# EAGLE board 14 pin sop (EAGLE 7.2.0)
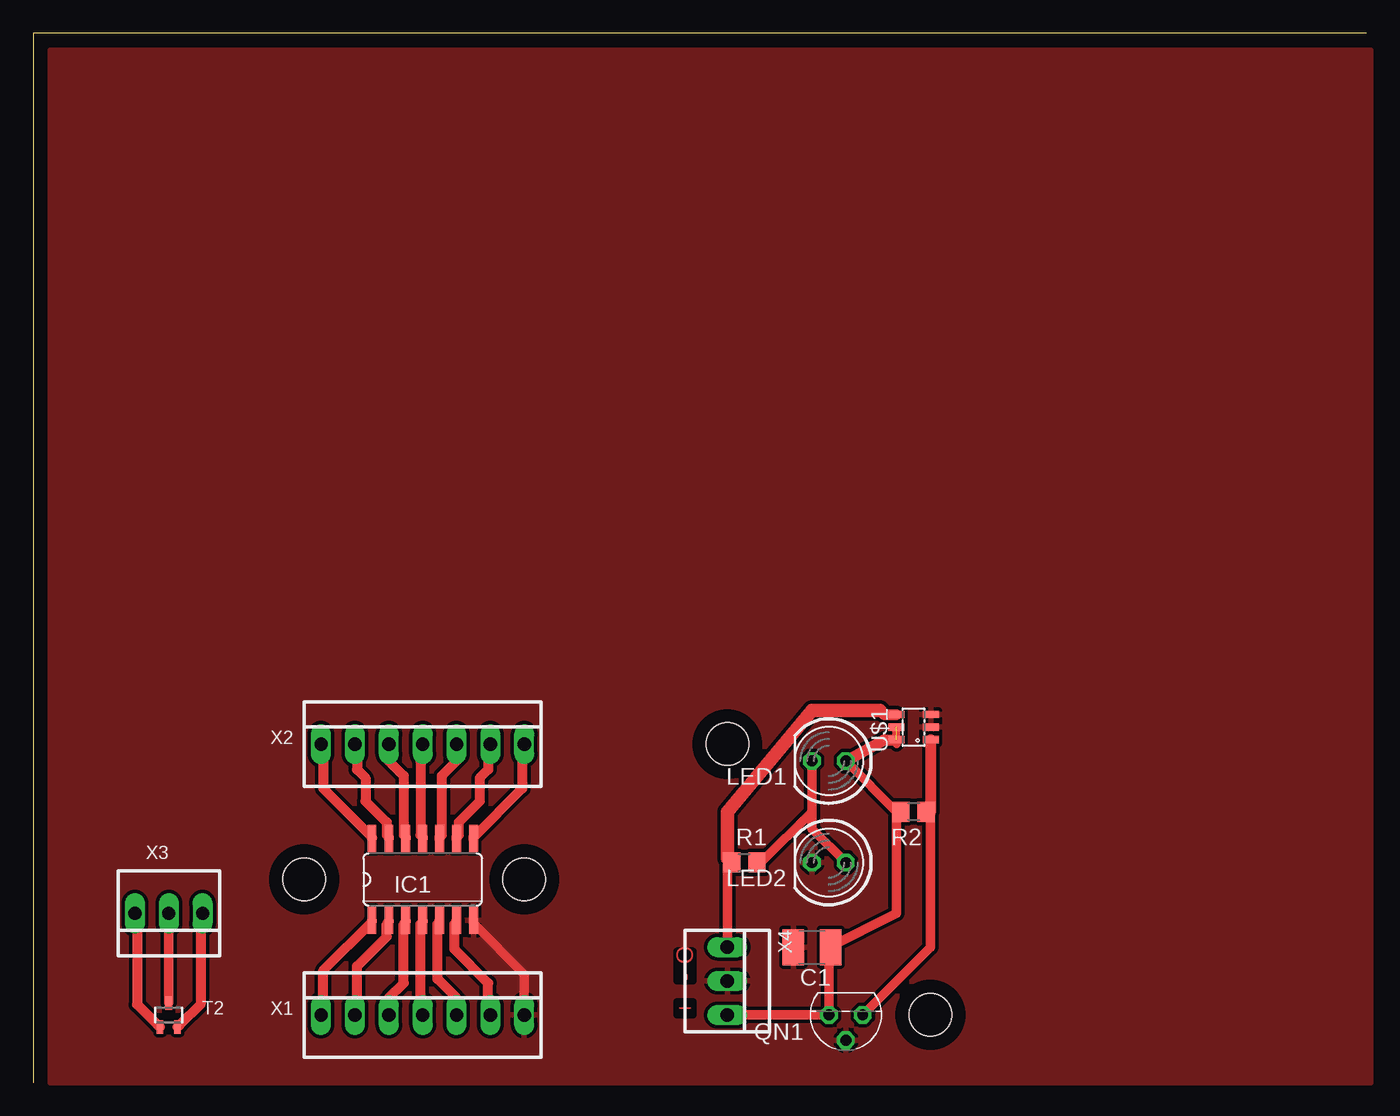
[diagram p0: board, top side]
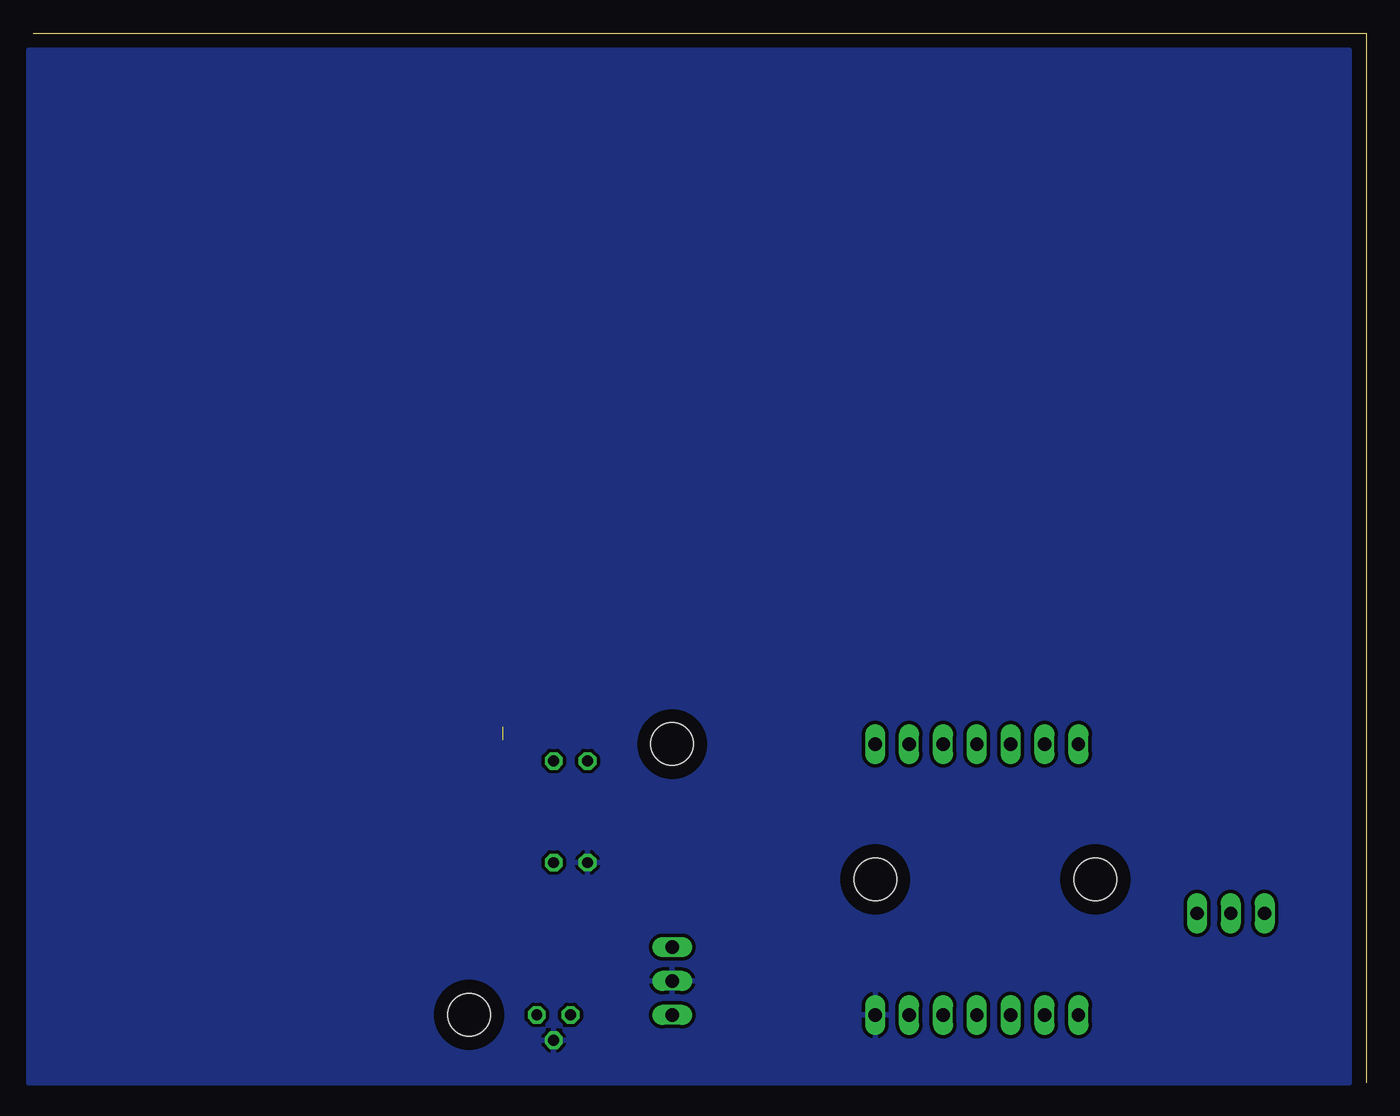
[diagram p1: board, bottom side, seen from below]

Size 100 x 78.73 mm. Coordinates in mm from the lower left corner, seen from the top.
Outline: 100,78.73 0,78.73 0,0
Copper layers (1*16): Top 0.035mm / dielectric 1.5mm / Bottom 0.035mm
Design rules "14 pin sop *": minimum track width 10mil, minimum drill 24mil, track to track 0.205mm, track to pad 0.205mm, pad to pad 12mil, via to via 12mil, smd to smd 8mil, copper to edge 40mil, drill to drill 8mil, minimum pad ring 10mil, minimum via ring 8mil, stop-mask expansion 4mil, vias tented up to drill 0mil, thermal gap 10mil
Net classes: 0 default: width 0.711 mm, drill 0.508 mm, clearance 0.254 mm
Holes 3.2 mm at 36.83,15.24 20.32,15.24 52.07,25.4 67.31,5.08

## Footprints (pad centres in the part's own frame; a part is rotated, then mirrored left to right if it is on the bottom)
C1210 = smd 1.6 x 2.7: 1 -1.4,0; 2 1.4,0
SO14 = smd 0.66 x 2.032: 1 -3.81,-3.073; 2 -2.54,-3.073; 3 -1.27,-3.073; 4 0,-3.073; 5 1.27,-3.073; 6 2.54,-3.073; 7 3.81,-3.073; 8 3.81,3.073; 9 2.54,3.073; 10 1.27,3.073; 11 0,3.073; 12 -1.27,3.073; 13 -2.54,3.073; 14 -3.81,3.073
LED5MM = drill 0.813 octagon: A -1.27,0; K 1.27,0
TO92 = drill 0.813 octagon: 1 1.27,0; 2 0,1.905; 3 -1.27,0
R0805 = smd 1.3 x 1.5: 1 -0.95,0; 2 0.95,0
SOT323 = smd 0.5 x 1: 1 0,0.9; 2 -0.65,-0.9; 3 0.65,-0.9
SOT23-6 = smd 0.55 x 1.2: 1 -0.95,-1.3; 2 0,-1.3; 3 0.95,-1.3; 4 0.95,1.3; 5 0,1.3; 6 -0.95,1.3
22-23-2071 = drill 1 long: 1 -7.62,0; 2 -5.08,0; 3 -2.54,0; 4 0,0; 5 2.54,0; 6 5.08,0; 7 7.62,0
22-23-2031 = drill 1 long: 1 -2.54,0; 2 0,0; 3 2.54,0

## Placement (x,y rotation side)
C1  100nF  [C1210]  58.42,10.16 180 top
IC1  74AS04D  [SO14]  29.21,15.24 0 top
LED1  On  [LED5MM]  59.69,24.13 180 top
LED2  Off  [LED5MM]  59.69,16.51 180 top
QN1  2N3904  [TO92]  60.96,5.08 180 top
R1  330  [R0805]  53.34,16.51 0 top
R2  10k  [R0805]  66.04,20.32 180 top
T2  BFR91  [SOT323]  10.16,5.08 0 top
U$1  LT3426  [SOT23-6]  66.04,26.67 90 top
X1  22-23-2071  [22-23-2071]  29.21,5.08 0 top
X2  22-23-2071  [22-23-2071]  29.21,25.4 0 top
X3  22-23-2031  [22-23-2031]  10.16,12.7 180 top
X4  22-23-2031  [22-23-2031]  52.07,7.62 270 top

## Library data of the parts
C1 U$1 = adafruit
IC1 = 74xx-eu; OC_NEWARK: unknown
LED1 LED2 = led
QN1 = PAsystem
R1 R2 = eagle-ltspice; SPICEMODEL: NONE; SPICEPREFIX: R
T2 = zetex; MPN: DSS4160U-7; OC_FARNELL: 1710696; OC_NEWARK: 25R4558
X1 X2 = con-molex; MF: MOLEX; MPN: 22-23-2071; OC_FARNELL: 1654534; OC_NEWARK: 56H0445
X3 X4 = con-molex; MF: MOLEX; MPN: 22-23-2031; OC_FARNELL: 1462950; OC_NEWARK: 30C0862

## Nets
GND: C1.2 IC1.7 LED2.K QN1.2 U$1.2 U$1.3 X1.7 X4.2
N$1: IC1.1 X1.1
N$2: IC1.2 X1.2
N$3: IC1.3 X1.3
N$4: IC1.4 X1.4
N$5: IC1.5 X1.5
N$6: IC1.6 X1.6
N$7: IC1.8 X2.7
N$8: IC1.9 X2.6
N$9: IC1.10 X2.5
N$10: IC1.11 X2.4
N$11: IC1.12 X2.3
N$12: IC1.13 X2.2
N$13: C1.1 LED1.A QN1.1 R2.2 U$1.5 U$1.6 X4.3
N$14: T2.2 X3.3
N$15: T2.3 X3.1
N$16: T2.1 X3.2
N$17: QN1.3 R2.1 U$1.1
N$19: R1.1 U$1.4 X4.1
N$20: LED1.K LED2.A R1.2
VCC: IC1.14 X2.1

## Tracks (layer width: path | path; a pad name or v marks a point on that pad's centre or on a via)
GND
  Top 0.711: X1.7 36.83,8.13 33.02,11.94 IC1.7
  pour Top: 1.27,77.47 1.27,0 100.33,0 100.33,77.47
  pour Bottom: 1.27,77.47 1.27,0 100.33,0 100.33,77.47
N$1
  Top 0.762: X1.1 21.59,6.19 21.75,6.35 21.75,8.41 25.4,12.07 IC1.1
N$2
  Top 0.762: X1.2 24.13,6.19 24.29,6.35 24.29,8.73 26.51,10.95 26.51,11.91 26.67,12.07 IC1.2
N$3
  Top 0.762: X1.3 26.67,6.35 27.78,7.46 27.78,11.91 27.94,12.07 IC1.3
N$4
  Top 0.762: X1.4 29.21,6.19 29.05,6.35 29.05,11.91 29.21,12.07 IC1.4
N$5
  Top 0.762: X1.5 31.75,6.35 30.32,7.78 30.32,11.91 30.48,12.07 IC1.5
N$6
  Top 0.762: X1.6 34.29,6.19 34.13,6.35 34.13,7.46 31.59,10 31.59,11.91 31.75,12.07 IC1.6
N$7
  Top 0.762: X2.7 36.83,24.29 36.67,24.13 36.67,22.07 33.02,18.41 IC1.8
N$8
  Top 0.762: X2.6 34.29,24.29 34.13,24.13 34.13,23.5 33.5,22.86 33.5,21.11 31.91,19.53 31.91,18.57 31.75,18.41 IC1.9
N$9
  Top 0.762: X2.5 31.75,24.13 30.64,23.02 30.64,18.57 30.48,18.41 IC1.10
N$10
  Top 0.762: X2.4 29.21,24.29 29.05,24.13 29.05,18.57 29.21,18.41 IC1.11
N$11
  Top 0.762: X2.3 26.67,24.13 27.78,23.02 27.78,18.57 27.94,18.41 IC1.12
N$12
  Top 0.762: X2.2 24.13,24.29 24.29,24.13 24.29,23.5 24.92,22.86 24.92,21.11 26.51,19.53 26.51,18.57 26.67,18.41 IC1.13
N$13  (1 unrouted)
  Top 0.711: LED1.A 64.77,20.32 | 64.77,20.32 R2.2 | 59.69,10.16 QN1.1 X4.3 | 64.77,20.32 64.77,12.7 59.69,10.16 | 59.69,10.16 C1.1
  Top 0.813: LED1.A 63.82,25.72 U$1.6
N$14
  Top 0.762: X3.3 7.62,11.59 7.78,11.43 7.78,5.87 9.37,4.29 T2.2
N$15
  Top 0.762: X3.1 12.7,11.59 12.54,11.43 12.54,5.87 10.95,4.29 T2.3
N$16
  Top 0.711: X3.2 T2.1
N$17
  Top 0.711: QN1.3 67.31,10.16 67.31,20.32 R2.1
  Top 0.813: 67.31,20.32 67.34,20.35 U$1.1
N$18
  Top 0.61: 64.77,25.4 64.77,26.67
N$19
  Top 0.711: X4.1 52.07,16.51 R1.1
  Top 0.813: 63.5,27.94 63.82,27.62 U$1.4
  Top 1.016: R1.1 52.07,16.83 52.07,20.32 58.42,27.94 63.5,27.94
N$20
  Top 0.711: 58.42,20.32 54.61,16.51 R1.2 | LED1.K 58.42,20.32 | LED2.A 58.42,19.05 58.42,20.32
VCC
  Top 0.762: X2.1 21.59,24.29 21.75,24.13 21.75,22.07 25.4,18.41 IC1.14

## Text on the board
Top: O | - | +